# Altium PCB PCB1.PcbDoc
Units mil, origin at the board's own origin, x right, y up, seen from the top; angles counter-clockwise.
Board outline 6000 x 4000 mil, 2 copper layers (Top Layer, Bottom Layer); 31 components, 32 nets, 145 pads, 6 vias.
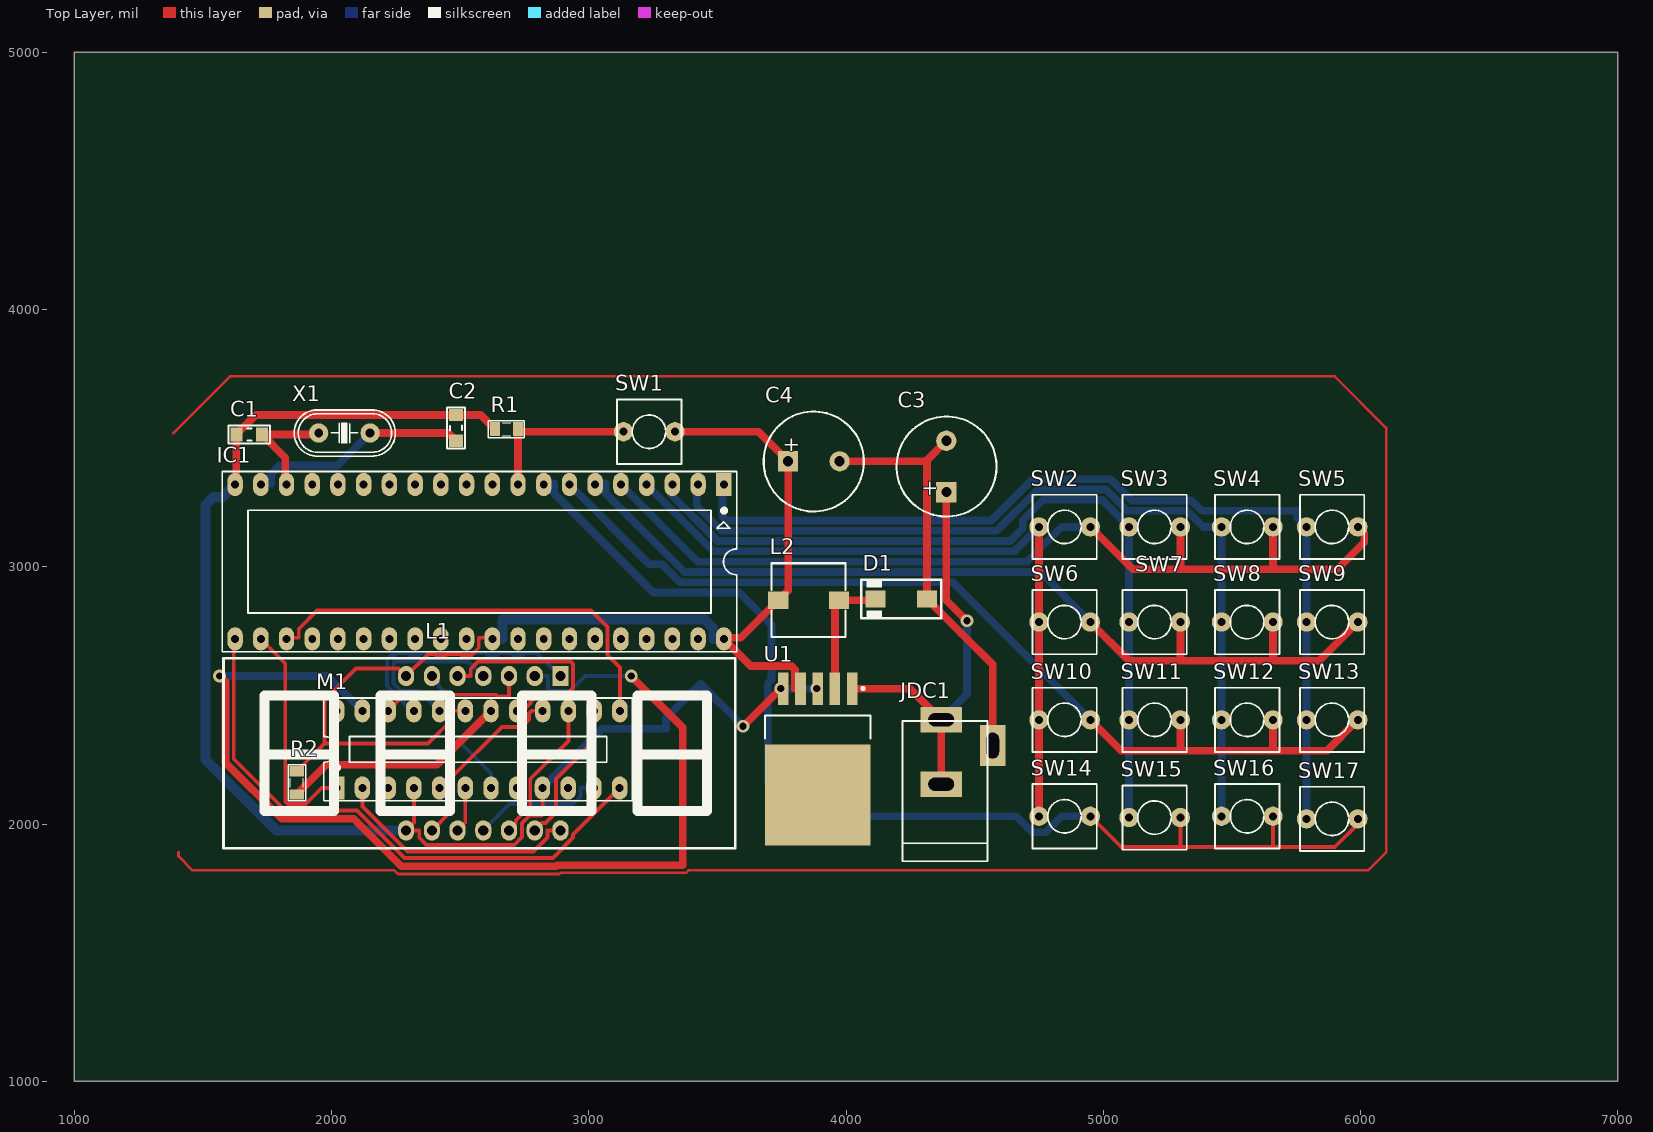
[diagram p0: Top Layer view]
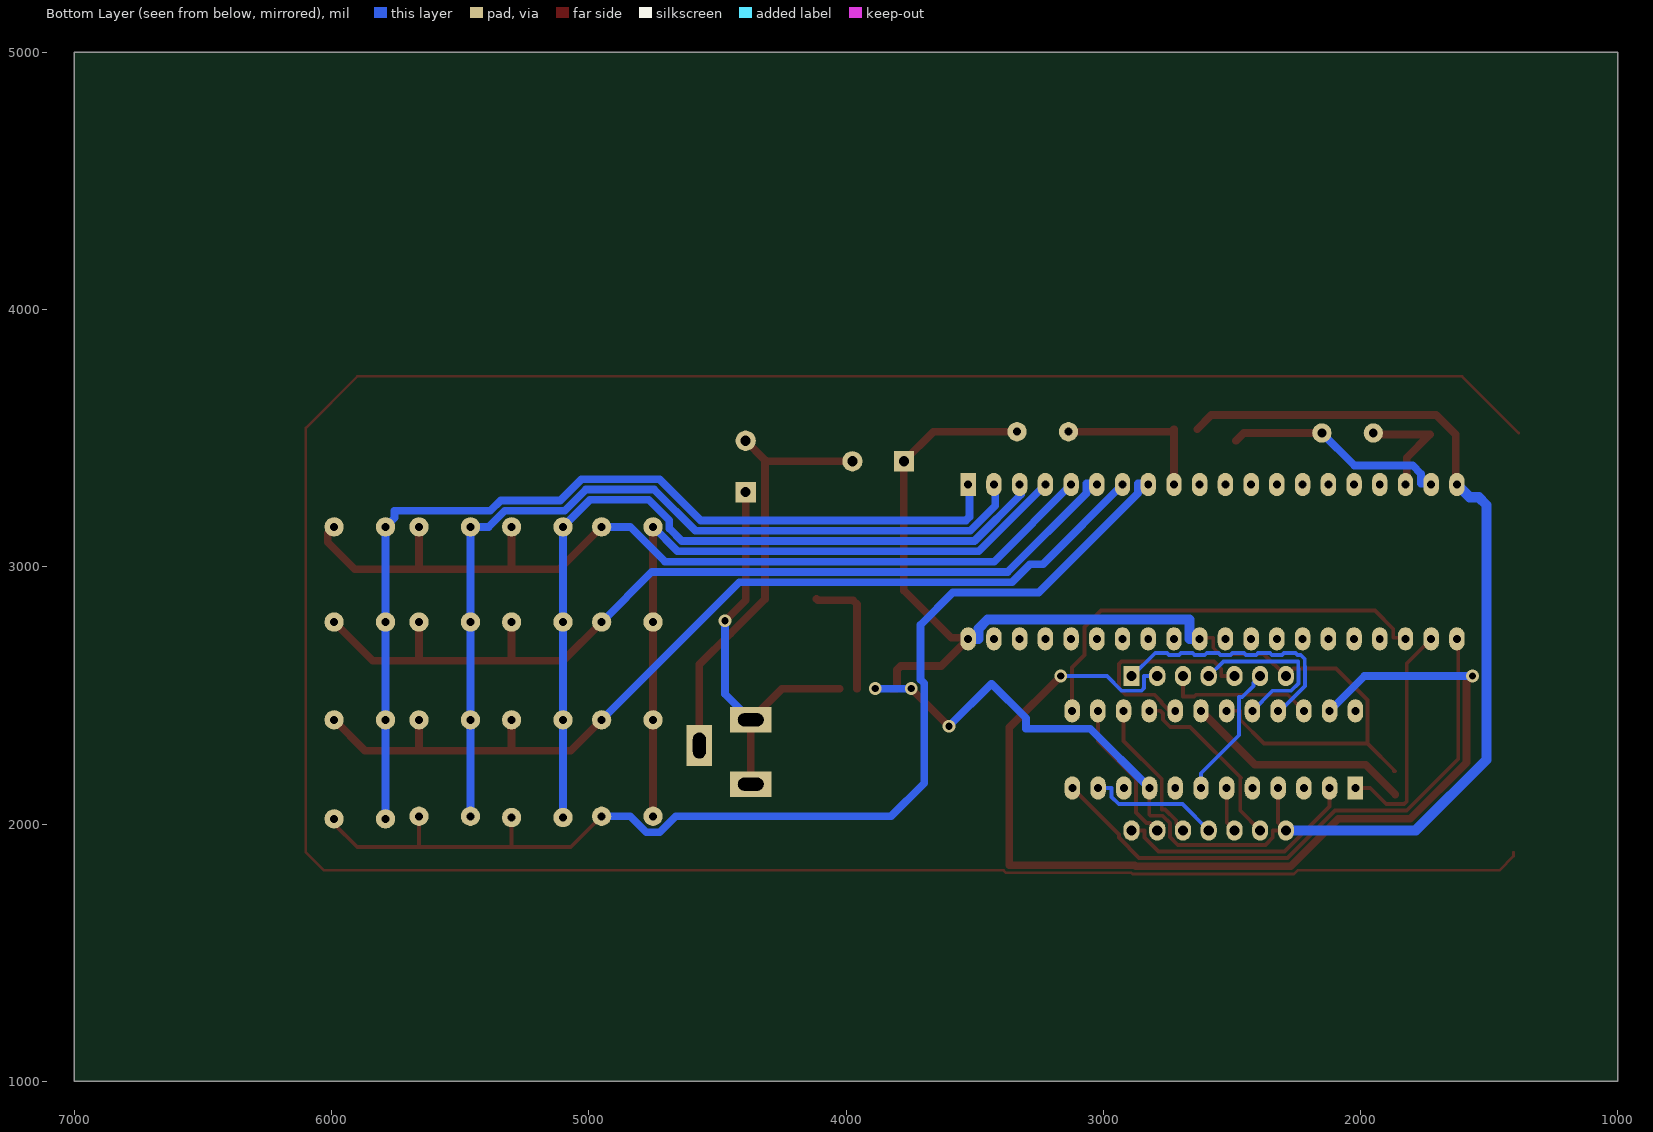
[diagram p1: Bottom Layer view, seen from below]

## Layer stack, top to bottom
Top Solder: solder mask 0.4, Solder Resist, Dk 3.5
Top Layer: signal copper 1.4
Dielectric 1: dielectric 12.6, FR-4, Dk 4.8
Bottom Layer: signal copper 1.4
Bottom Solder: solder mask 0.4, Solder Resist, Dk 3.5

## Board outline
1000,1000 7000,1000 7000,5000 1000,5000

## Design rules (kind name [scope] priority, off if disabled: settings)
Clearance [All] p1: gap=10 ignorepadtopadclearanceinfootprint=FALSE except(0: Arc-Hole Track-Hole SMDPad-Hole THPad-Hole Via-Hole Fill-Hole Poly-Hole Region-Hole Text-Hole)
PolygonConnect [All] p1: connectstyle=Relief reliefconductorwidth=10 reliefentries=4 polygonreliefangle="90 Angle" airgapwidth=10
RoomDefinition 4 [InComponentClass('4')] p1: confinementstyle=ConfineIn formatcopy=TRUE lockcomponents=FALSE outline 3500,1845 4650,1845 4650,3740 3500,3740
RoomDefinition 3 [InComponentClass('3')] p2: confinementstyle=ConfineIn formatcopy=TRUE lockcomponents=FALSE outline 4020,1465 6180,1465 6180,3405 4020,3405
RoomDefinition 2 [InComponentClass('2')] p3: confinementstyle=ConfineIn formatcopy=TRUE lockcomponents=FALSE outline 3585,1250 3585,2665 1475,2665 1475,1250
RoomDefinition 1 [InComponentClass('1')] p4: confinementstyle=ConfineIn formatcopy=TRUE lockcomponents=FALSE outline 1395.01,1619 3680.01,1619 3680.01,4234 1395.01,4234
RoutingVias [All] p1: holewidth=28 width=50 viastyle="Through Hole" minholewidth=28 minwidth=50 maxholewidth=28 maxwidth=50
SolderMaskExpansion [All] p1: expansion=4
Width [All] p1: maxlimit=40 minlimit=15 preferedwidth=30
30 further rules are at their usual default settings.

## Classes and differential pairs
component class 4: C3 C4 D1 JDC1 L2 U1
component class 3: SW2 SW3 SW4 SW5 SW6 SW7 SW8 SW9 SW10 SW11 SW12 SW13 SW14 SW15 SW16 SW17
component class 2: L1 M1 R2
component class 1: C1 C2 IC1 R1 SW1 X1

## Components (designator, comment, footprint, x,y, rotation, side; value= is the part's Value field where it differs from the comment)
C1 "104" CAP_0805 1680,3515 r0 top value=33p
C2 "104" CAP_0805 2485,3540 r270 top value=33p
C3 "Cap Pol" C10mm 4390,3390 r90 top
C4 "Cap Pol" C10mm 3875,3410 r0 top
D1 "1N5822" SMA 4215,2875 r180 top value="Diode c?m 1N5408"
IC1 "AT89C52" DIP40/W0.6 3525,3320 r180 top
JDC1 "Jac DC" DC-IN 4470,2280 r90 top
L1 "Led 7 Seg 4 digit - Anode" LED7SEG-4-0.56-RG 2570,2280 r180 top
L2 "150mH" L-SMD-M-7.3x4.5 3855,2870 r270 top value="150 mH"
M1 "MAX7219ENG" DIP24/W0.3 2020,2140 r0 top
R1 "1k" RES-SMD-0805 2680,3535 r0 top
R2 "1k" RES-SMD-0805 1865,2160 r90 top
SW1 "SW" SW2 3135,3525 r0 top value="SW chip 2 pin"
SW2 "SW" SW2 4750,3155 r0 top value="SW chip 2 pin"
SW3 "SW" SW2 5100,3155 r0 top value="SW chip 2 pin"
SW4 "SW" SW2 5460,3155 r0 top value="SW chip 2 pin"
SW5 "SW" SW2 5790,3155 r0 top value="SW chip 2 pin"
SW6 "SW" SW2 4750,2785 r0 top value="SW chip 2 pin"
SW7 "SW" SW2 5100,2785 r0 top value="SW chip 2 pin"
SW8 "SW" SW2 5460,2785 r0 top value="SW chip 2 pin"
SW9 "SW" SW2 5790,2785 r0 top value="SW chip 2 pin"
SW10 "SW" SW2 4750,2405 r0 top value="SW chip 2 pin"
SW11 "SW" SW2 5100,2405 r0 top value="SW chip 2 pin"
SW12 "SW" SW2 5460,2405 r0 top value="SW chip 2 pin"
SW13 "SW" SW2 5790,2405 r0 top value="SW chip 2 pin"
SW14 "SW" SW2 4750,2030 r0 top value="SW chip 2 pin"
SW15 "SW" SW2 5100,2025 r0 top value="SW chip 2 pin"
SW16 "SW" SW2 5460,2030 r0 top value="SW chip 2 pin"
SW17 "SW" SW2 5790,2020 r0 top value="SW chip 2 pin"
U1 "LM2976" TO-263 3890,2290 r270 top
X1 "4Mhz" XT2 2050,3520 r180 top

## Footprints (in the part's own frame and the unit in brackets; to place one, negate y for a bottom-side part, rotate by r counter-clockwise, add the part's x,y. Pads: shape width x height; smd on the part's side, far side on the other; paste and mask are expansions set on the pad)
C10mm [mm]
  rect 2x2 hole 1: 1(-2.54,0)
  round 2 hole 1: 2(2.54,0)
  silkscreen extent -4.95,-4.96 4.93,4.92, body extent -5,-5 4.97,5, height 20.01
CAP_0805 [mm]
  rect 1.2x1.4 smd: 1(-1.27,-0.025) 2(1.27,-0.025)
  silkscreen extent -2.03,-0.91 2.03,0.86, body extent -1.01,-0.66 1.01,0.61, height 0.61
DC-IN [mil] "Jac DC input"
  rect 100x160 hole 50 slot 100 at 90 deg: 1(125,100) 2(-125,100)
  rect 160x100 hole 50 slot 100 at 0 deg: 3(25,-100)
  silkscreen extent -425,-80 120,250, body extent -410,-105 134,269, height 434
DIP24/W0.3 [mil] "DIP24/W.300, Pin to pin 100mil"
  rect 60x90 hole 31: 1(0,0)
  oval 60x90 hole 31: 2(100,0) 3(200,0) 4(300,0) 5(400,0) 6(500,0) 7(600,0) 8(700,0) 9(800,0) 10(900,0) 11(1000,0) 12(1100,0) 13(1101,300) 14(1001,300) 15(901,300) 16(801,300) 17(700,300) 18(600,300) 19(500,300) 20(400,300) 21(300,300) 22(200,300) 23(100,300) 24(0,300)
  silkscreen extent -50,-50 1150,350, body extent -89,-3 1181,307, height 200
DIP40/W0.6 [mil] "40 PIN, W 600mil, Pin to pin 100mil"
  rect 60x90 hole 31: 1(0,0)
  oval 60x90 hole 31: 2(100,0) 3(200,0) 4(300,0) 5(400,0) 6(500,0) 7(600,0) 8(700,0) 9(800,0) 10(900,0) 11(1000,0) 12(1100,0) 13(1200,0) 14(1300,0) 15(1400,0) 16(1500,0) 17(1600,0) 18(1700,0) 19(1800,0) 20(1900,0) 21(1900,600) 22(1800,600) 23(1700,600) 24(1600,600) 25(1500,600) 26(1400,600) 27(1300,600) 28(1200,600) 29(1100,600) 30(1000,600) 31(900,600) 32(800,600) 33(700,600) 34(600,600) 35(500,600) 36(400,600) 37(300,600) 38(200,600) 39(100,600) 40(0,600)
  silkscreen extent -50,-50 1950,650, body extent -82,-10 1982,600, height 224
L-SMD-M-7.3x4.5 [mm] "WE-PDA SMD Shielded Power Inductor, 7345"
  rect 1.7x2 smd: 1(0,3) 2(0,-3)
  silkscreen extent -3.65,-3.65 3.65,3.65, body extent -3.65,-3.65 3.65,3.65, height 4.05
LED7SEG-4-0.56-RG [mil]
  round 60 on Top Overlay: 0(-535,-205) 0(-85,-205) 0(465,-205) 0(915,-205)
  round 118.11 on Top Overlay: 0(-20,155) 0(-20,-95)
  rect 62.99x78.74 hole 39.37: 1(-320,-295)
  oval 62.99x78.74 hole 39.37: 2(-220,-295) 3(-120,-295) 4(-20,-295) 5(80,-295) 6(180,-295) 7(280,-295) 8(280,305) 9(180,305) 10(80,305) 11(-20,305) 12(-120,305) 13(-220,305) 14(-320,305)
  silkscreen extent -1000,-365 990,375, body extent -995,-370 985,378, height 565
RES-SMD-0805 [mil]
  rect 39.37x55 smd: 1(-45,0) 2(45,0)
  silkscreen extent -70,-34 70,33, body extent -39,-25 39,25, height 31
SMA [mm]
  rect 2x1.7 smd: 1(-2.544,0) 2(2.544,0)
  silkscreen extent -3.94,-1.9 3.94,1.91, body extent -2.87,-1.4 2.87,1.4, height 2.29
SW2 [mil] "SW button 2pin, 250x 250 mil"
  round 75 hole 31: 1(0,0) 2(200,0)
  silkscreen extent -25,-125 225,125
TO-263 [mm]
  rect 3.2x1.05 smd: 1(-6,3.4) 2(-6,1.7) 3(-6,0) 4(-6,-1.7) 5(-6,-3.4)
  rect 10x10.45 smd: 6(4.5,0)
  silkscreen extent -6.12,-5.2 -1.1,5.2, body extent -6.58,-5.2 7.57,5.2, height 4.65
XT2 [mil] "Footpin for Crystal 2 pin"
  round 75 hole 34: 1(-100,0) 2(100,0)
  silkscreen extent -198,-90 195,90, body extent -233,-93 213,90, height 138

## Part data
C1 C2: library part CapSMD, "Capacitor", LatestRevisionDate=17-Jul-2002, LatestRevisionNote="Re-released for DXP Platform.", PackageReference=RAD-0.3, Published=8-Jun-2000, Publisher="Altium Limited"
C3 C4: "Polarized Capacitor (Axial)", LatestRevisionDate=17-Jul-2002, LatestRevisionNote="Re-released for DXP Platform.", PackageReference=POLAR0.8, Published=8-Jun-2000, Publisher="Altium Limited"
D1: "Schottky Rectifiers"
IC1: "Atmel AT89C52, 8k Byte Flash Memory , 40 Pin"
JDC1: library part DCIN, "Jac DC input"
L1: library part LED7SEG-4-RG
L2: library part Inductor, "Inductor"
M1: "Serially Interfaced, 8-Digit LED Display Driver", Code_JEDEC=MS-001-AF, ComponentLink1Description="Manufacturer Link", ComponentLink1URL=http://www.maxim-ic.com/, ComponentLink2Description=Datasheet, ComponentLink2URL=http://pdfserv.maxim-ic.com/en/ds/MAX7219-MAX7221.pdf, DatasheetVersion=Jul-1997, LatestRevisionDate=29-May-2009, LatestRevisionNote="Component Body Added.", PackageDescription="DIP, 24-Pin, Row Spacing 7.62 mm, Pitch 2.54 mm", PackageReference=NG24A, PackageVersion=1997, Published=16-Jan-2001, Publisher="Altium Limited"
R1 R2: library part "Resistor - SMD", "Resistor", Manufacturer="Generic Components", Class=Passive, Published=08/06/2000, Publisher="Altium Hobart Technology Centre"
SW1 SW2 SW3 SW4 SW5 SW6 SW7 SW8 SW9 SW10 SW11 SW12 SW13 SW14 SW15 SW16 SW17: library part SW2, "Switch button 2 pin"
U1: library part LM2596, Max Input Voltage="12 V", Max Output Current="3 (6.0 peak) A", Max Output Voltage=mV, Temperature Range="-40 to +125 degC", Category=IC-Power, Min Input Voltage=mV, Min Output Voltage=mV, Mounting Technology="Surface Mount", Status=Unreleased, Supply Voltage=mV
X1: library part XT2, "Crystal For all Crystal 2pin."

## Via types
v1: diameter 50, hole 28, Top Layer to Bottom Layer, 6 vias

## Nets (pads, with @x,y where several pads share a name; then routed paths per layer and width w, separated by ;. In a path a pad name is that pad's centre, name@x,y a point inside that pad or via, vN(x,y) a via of type N, cw(c..) or ccw(c..) an arc to the next point about the centre after c; other vN are vias at no path point)
5V: C4.1 IC1.31 IC1.40 L1.7 L2.2 M1.19 R2.2 SW1.2 U1.4 | length 4527.3
  Top Layer w15: R2.2@1870,2205 R2.2 1972.5,2312.5 ; M1.19 2467.5,2440 2467.5,2405.32 2374.67,2312.5 1972.5,2312.5 ; IC1.31@2620.01,2724 2572.5,2724 2572.5,2685.32 2544.68,2657.5 2505.32,2657.5 2501.32,2661.5 2448.68,2661.5 2444.68,2657.5 2405.32,2657.5 2401.32,2661.5 2376.5,2661.5 L1.7 2260,2605 2095.32,2605 1972.5,2482.18 1972.5,2312.5
  Top Layer w30: SW1.2 3660,3525 C4.1 3775,2908.11 L2.2 3590.89,2724 3520.01,2724 3629.79,2614.21 3787.17,2614.21 3801.81,2599.57 3801.81,2526.22 U1.4
  Bottom Layer w40: IC1.31 2665,2720 2665,2795 3449.85,2795 3485,2759.85 3485,2720 IC1.40
DIG0: L1.14 M1.2 | length 964.9
  Top Layer w15: M1.2 2120,2067.84 2294.71,1893.13 2785.29,1893.13 2839,1946.83 2839,1975 L1.14
DIG1: L1.11 M1.11 | length 518.7
  Bottom Layer w15: L1.11 2692.5,2077.5 2939.68,2077.5 2967.5,2105.32 2967.5,2140 M1.11
DIG2: L1.10 M1.6 | length 177.4
  Top Layer w15: L1.10 2520,2005 M1.6
DIG3: L1.6 M1.7 | length 537.6
  Bottom Layer w15: L1.6 2416,2549 2416,2536.48 2459.35,2493.13 2471.87,2493.13 2472.5,2492.5 2472.5,2345 2620,2197.5 M1.7
GND: C1.1 C2.1 IC1.20 L1.8 M1.4 M1.9 R1.1 U1.3 U1.5 | length 5621.5
  Top Layer w15: M1.4 2320,2005 L1.8 2341,1975 2341,1946.83 2369.71,1918.13 2710.29,1918.13 2741,1948.84 2741,2003.17 2769.71,2031.87 2816.36,2031.87 2821,2036.51 2821,2139 M1.9
  Top Layer w30: IC1.20@1620.01,3324 1630,3333.99 C1.1 1706,3590 C2.1 2580,3590 R1.1 ; v1(3600,2380) v1(3746.22,2526.22) U1.5
  Bottom Layer w30: M1.9 3050,2370 3300,2370 3300,2411.21 3434.39,2545.61 v1(3600,2380) ; v1(3746.22,2526.22) v1(3886.22,2526.22) v1@3890,2530
  Bottom Layer w40: IC1.20 1575,3270 1540,3270 1510,3240 1510,2250 1785,1975 L1.8
NetC1_2: C1.2 IC1.18 X1.2 | length 449.8
  Top Layer w30: IC1.18@1820.01,3324 1820.01,3423.99 C1.2 1944,3514 X1.2
NetC2_2: C2.2 IC1.19 X1.1 | length 879.7
  Top Layer w30: X1.1 2454,3520 C2.2
  Bottom Layer w30: IC1.19@1720.01,3324 1765.01,3324 1765.01,3361.78 1797.22,3394 2024,3394 X1.1
NetC3_1: C3.1 JDC1.1 JDC1.2 U1.1 | length 1620.1
  Top Layer w30: U1.1 4248.78,2526.22 JDC1.1 ; JDC1.2 JDC1.1 ; JDC1.1@4375,2410 JDC1.1 ; C3.1@4395,3295 C3.1 4390,2870 v1(4470,2790)
  Bottom Layer w30: JDC1.1 4470,2505 v1(4470,2790)
NetC3_2: C3.2 C4.2 D1.1 JDC1.3 | length 1664.4
  Top Layer w30: C4.2 4310,3410 4315.16,3415.16 ; C3.2 4315.16,3415.16 ; JDC1.3 4570,2620.16 4450.16,2740 4449.29,2740 4315.16,2874.13 D1.1 4315.16,3415.16
NetD1_2: D1.2 L2.1 U1.2 | length 494.3
  Top Layer w30: U1.2 3956.93,2853.82 L2.1 4109.84,2870 D1.2
NetIC1_1: IC1.1 SW5.1 SW9.1 SW13.1 SW17.1 | length 3700
  Bottom Layer w30: IC1.1@3520.01,3324 3520.01,3193.71 3533.71,3180 4565,3180 4725,3340 5028.14,3340 5110.64,3257.5 5342.46,3257.5 5382.46,3217.5 5755,3217.5 5755,3190 SW5.1 SW9.1 SW13.1 SW17.1
NetIC1_2: IC1.2 SW4.1 SW8.1 SW12.1 SW16.1 | length 3418.4
  Bottom Layer w30: IC1.2@3420.01,3324 3420.01,3237.14 3517.14,3140 4585,3140 4745,3300 5011.57,3300 5094.07,3217.5 5325.89,3217.5 5388.39,3155 SW4.1 SW8.1 SW12.1 SW16.1
NetIC1_3: IC1.3 SW3.1 SW7.1 SW11.1 SW15.1 | length 3156.6
  Bottom Layer w30: IC1.3@3320.01,3324 3320.01,3280.57 3500.57,3100 4638.43,3100 4687.5,3149.07 4687.5,3180.89 4766.61,3260 4995,3260 SW3.1 SW7.1 SW11.1 SW15.1
NetIC1_4: IC1.4 SW2.1 SW6.1 SW10.1 SW14.1 | length 2803.7
  Top Layer w30: SW14.1 SW10.1 SW6.1 SW2.1
  Bottom Layer w30: IC1.4@3220.01,3324 3484.01,3060 4655,3060 SW2.1
NetIC1_5: IC1.5 SW2.2 SW3.2 SW4.2 SW5.2 | length 3595.2
  Top Layer w30: SW2.2 5115,2990 5305,2990 ; SW3.2 5300,2995 5305,2990 ; SW4.2 5660,3000 5650,2990 ; SW5.2 6015,3130 6015,3095 5910,2990 5650,2990 ; 5305,2990 5650,2990
  Bottom Layer w30: IC1.5@3120.01,3324 3424.01,3020 4703.39,3020 4838.39,3155 SW2.2
NetIC1_6: IC1.6 SW6.2 SW7.2 SW8.2 SW9.2 | length 3648.8
  Top Layer w30: SW6.2@4955,2785 SW6.2 5100,2635 5300,2635 ; SW7.2 5300,2635 ; SW8.2 5660,2645 5650,2635 ; SW9.2 5840,2635 5650,2635 ; 5300,2635 5650,2635
  Bottom Layer w30: IC1.6@3020.01,3324 3065.01,3324 3065.01,3286.22 3371.22,2980 4755,2980 SW6.2
NetIC1_7: IC1.7 SW10.2 SW11.2 SW12.2 SW13.2 | length 3807.1
  Top Layer w15: SW13.2@5975,2405 SW13.2
  Top Layer w30: SW10.2 5070,2285 5300,2285 ; SW11.2 5300,2285 ; SW12.2 5660,2290 5655,2285 ; SW13.2 5870,2285 5655,2285 ; 5300,2285 5655,2285
  Bottom Layer w30: IC1.7@2920.01,3324 3234.01,3010 3284.66,3010 3354.66,2940 4415,2940 SW10.2
NetIC1_8: IC1.8 SW14.2 SW15.2 SW16.2 SW17.2 | length 4509.4
  Top Layer w10: SW14.2@4950,2025 SW14.2
  Top Layer w15: SW14.2 5070,1910 5295,1910 ; SW15.2 5300,1915 5295,1910 ; SW16.2 5660,1910 ; SW17.2 5990,2000 5900,1910 5660,1910 ; 5295,1910 5660,1910
  Bottom Layer w30: IC1.8@2820.01,3324 2865.01,3324 2865.01,3286.22 3251.22,2900 3585,2900 3710,2775 3710,2560.71 3696.22,2546.93 3696.22,2158.78 3825,2030 4661.61,2030 4724.11,1967.5 4775.89,1967.5 4838.39,2030 SW14.2
NetIC1_9: IC1.9 R1.2 SW1.1 | length 627.2
  Top Layer w30: IC1.9@2720.01,3324 2725,3328.99 R1.2 2735,3525 SW1.1
NetIC1_21: IC1.21 M1.12 | length 2246.3
  Top Layer w15: IC1.21@1620.01,2720 1620.01,2252.7 1819.9,2052.81 2099.67,2052.81 2284.35,1868.13 2860.29,1868.13 2939,1946.83 2939,1959 M1.12
NetIC1_22: IC1.22 M1.1 | length 907.4
  Top Layer w15: IC1.22@1720.01,2724 1820,2624.01 1820,2088.06 1830.25,2077.81 1899.75,2077.81 1961.94,2140 M1.1
NetIC1_23: IC1.23 M1.13 | length 1710
  Top Layer w15: IC1.23@1820.01,2744.99 1820.01,2724 1872.51,2724 1872.51,2758.68 1943.83,2830 3008,2830 3072.51,2765.49 3072.51,2657.49 3121,2609 M1.13
NetL1_1: L1.1 M1.21 | length 1001
  Bottom Layer w15: M1.21 2312.48,2440 2216,2536.48 2216,2613.52 2216.87,2614.39 2216.87,2642.23 2232.14,2657.5 2244.68,2657.5 2252.18,2665 2297.82,2665 2305.32,2657.5 2344.68,2657.5 2352.18,2665 2397.82,2665 2405.32,2657.5 2444.68,2657.5 2452.18,2665 2497.82,2665 2505.32,2657.5 2544.68,2657.5 2552.18,2665 2597.82,2665 2605.32,2657.5 2644.68,2657.5 2652.18,2665 2697.82,2665 2705.32,2657.5 2744.68,2657.5 2752.18,2665 2797.82,2665 2887.82,2575 L1.1
NetL1_2: L1.2 M1.23 | length 4169.7
  Top Layer w30: v1(1565,2575) 1587.51,2552.49 1587.51,2239.24 1806.43,2020.31 2086.2,2020.31 2270.89,1835.63 2873.76,1835.63 2878.13,1840 3365,1840 3365,2375 v1(3165,2575)
  Bottom Layer w15: L1.2 2841,2575 2841,2528.38 2851.26,2518.13 2928.74,2518.13 2985.61,2575 v1(3165,2575)
  Bottom Layer w30: v1(1565,2575) 1985,2575 M1.23
NetL1_3: L1.3 M1.22 | length 591.1
  Top Layer w15: M1.22 2282.5,2502.5 2639.68,2502.5 2647.18,2495 2690,2495 L1.3 L1.3@2695,2570
  Bottom Layer w15: L1.3@2690,2570 L1.3
NetL1_4: L1.4 M1.20 | length 680.3
  Bottom Layer w15: M1.20 2341.87,2518.13 2269.71,2518.13 2241,2546.83 2241,2603.17 2241.87,2604.03 2241.87,2631.87 2533.13,2631.87 L1.4
NetL1_5: L1.5 M1.17 | length 844.3
  Top Layer w15: L1.5 2541,2575 2541,2603.17 2569.71,2631.87 2928.74,2631.87 2939,2621.62 2939,2528.38 2913.11,2502.5 2801.32,2502.5 2773.5,2474.68 2773.5,2471 2742.5,2440 M1.17
NetL1_9: L1.9 M1.16 | length 715.9
  Top Layer w15: L1.9 2467.5,2052.5 2467.5,2177.18 2465,2179.68 2662.82,2377.5 2739.68,2377.5 2767.5,2405.32 2767.5,2429.64 2777.86,2440 M1.16
NetL1_12: L1.12 M1.15 | length 568
  Top Layer w15: L1.12 2716,2001 2716,2013.52 2759.35,2056.87 2771.87,2056.87 2772.5,2057.5 2772.5,2174.68 2921,2323.18 M1.15
NetL1_13: L1.13 M1.14 | length 568
  Top Layer w15: L1.13 2818.84,2003.84 2831.36,2003.84 2872.5,2044.98 2872.5,2174.68 3021,2323.18 M1.14
NetM1_18: M1.18 R2.1 | length 889.6
  Top Layer w30: R2.1 1980,2230 2410,2230 M1.18
pads on no net: IC1.10 IC1.11 IC1.12 IC1.13 IC1.14 IC1.15 IC1.16 IC1.17 IC1.24 IC1.25 IC1.26 IC1.27 IC1.28 IC1.29 IC1.30 IC1.32 IC1.33 IC1.34 IC1.35 IC1.36 IC1.37 IC1.38 IC1.39 L1.0 M1.3 M1.5 M1.8 M1.10 M1.24 U1.6
copper on no net: | length 11312.7
  Top Layer w10: 1385,3520 1605,3740 5900,3740 6100,3540 6100,1890 6030,1820 3387.43,1820 3377.43,1810 2890.55,1810 2886.18,1805.63 2258.46,1805.63 2244.09,1820 1460,1820 1405,1875 1405,1890

## Text inside footprints (layer, text, board x,y; h text height)
C3: Top Overlay "+" at 4350,3270 h60 r90
C4: Top Overlay "+" at 3755,3450 h60